# EAGLE board CT_schematic (EAGLE 7.6.0)

Size 100 x 80 mm. Coordinates in mm from the lower left corner, seen from the top.
Outline: 0,0 100,0 100,80 0,80 0,0
Copper layers (1*16): Top 0.035mm / dielectric 1.5mm / Bottom 0.035mm
Design rules "default": minimum track width 10mil, minimum drill 24mil, track to track 8mil, track to pad 8mil, pad to pad 8mil, via to via 8mil, smd to smd 8mil, copper to edge 40mil, drill to drill 8mil, minimum pad ring 10mil, minimum via ring 8mil, stop-mask expansion 4mil, vias tented up to drill 0mil, thermal gap 10mil

## Footprints (pad centres in the part's own frame; a part is rotated, then mirrored left to right if it is on the bottom)
C0603 = smd 0.8 x 0.8: 1 -0.762,0; 2 0.762,0
C0402 = smd 0.5 x 0.5: 1 -0.508,0; 2 0.508,0
C0805 = smd 1.2 x 1.3: 1 -1.016,0; 2 1.016,0
2220 = smd 1.85 x 5.5: 1 -2.55,0; 2 2.55,0
EXV-9H = smd 3.505 x 1.676: 1 -2.857,0; 2 2.857,0
L0603 = smd 0.8 x 0.8: 1 -0.762,0; 2 0.762,0
DR1040 = smd 1.6 x 3.2: 1 -4.458,0; 2 4.458,0
PJ-037B_PACKAGE = drill 3.7 square: 1 12,0 | drill 3.2 square: 2 6,0
R0603 = smd 0.8 x 0.8: 1 -0.762,0; 2 0.762,0
LQFP64 = smd 0.3 x 1.2: 1 -3.75,-5.75; 2 -3.25,-5.75; 3 -2.75,-5.75; 4 -2.25,-5.75; 5 -1.75,-5.75; 6 -1.25,-5.75; 7 -0.75,-5.75; 8 -0.25,-5.75; 9 0.25,-5.75; 10 0.75,-5.75; 11 1.25,-5.75; 12 1.75,-5.75; 13 2.25,-5.75; 14 2.75,-5.75; 15 3.25,-5.75; 16 3.75,-5.75; 33 3.75,5.75; 34 3.25,5.75; 35 2.75,5.75; 36 2.25,5.75; 37 1.75,5.75; 38 1.25,5.75; 39 0.75,5.75; 40 0.25,5.75; 41 -0.25,5.75; 42 -0.75,5.75; 43 -1.25,5.75; 44 -1.75,5.75; 45 -2.25,5.75; 46 -2.75,5.75; 47 -3.25,5.75; 48 -3.75,5.75 | smd 1.2 x 0.3: 17 5.75,-3.75; 18 5.75,-3.25; 19 5.75,-2.75; 20 5.75,-2.25; 21 5.75,-1.75; 22 5.75,-1.25; 23 5.75,-0.75; 24 5.75,-0.25; 25 5.75,0.25; 26 5.75,0.75; 27 5.75,1.25; 28 5.75,1.75; 29 5.75,2.25; 30 5.75,2.75; 31 5.75,3.25; 32 5.75,3.75; 49 -5.75,3.75; 50 -5.75,3.25; 51 -5.75,2.75; 52 -5.75,2.25; 53 -5.75,1.75; 54 -5.75,1.25; 55 -5.75,0.75; 56 -5.75,0.25; 57 -5.75,-0.25; 58 -5.75,-0.75; 59 -5.75,-1.25; 60 -5.75,-1.75; 61 -5.75,-2.25; 62 -5.75,-2.75; 63 -5.75,-3.25; 64 -5.75,-3.75
SOIC-8 = smd 1.6 x 0.6: 1 -2.7,1.905 | smd 1.55 x 0.6: 2 -2.7,0.635; 3 -2.7,-0.635; 4 -2.7,-1.905; 5 2.7,-1.905; 6 2.7,-0.635; 7 2.7,0.635; 8 2.7,1.905
SSOP-28 = smd 1.5 x 0.4: 1 -3.625,4.225; 2 -3.625,3.575; 3 -3.625,2.925; 4 -3.625,2.275; 5 -3.625,1.625; 6 -3.625,0.975; 7 -3.625,0.325; 8 -3.625,-0.325; 9 -3.625,-0.975; 10 -3.625,-1.625; 11 -3.625,-2.275; 12 -3.625,-2.925; 13 -3.625,-3.575; 14 -3.625,-4.225; 15 3.625,-4.225; 16 3.625,-3.575; 17 3.625,-2.925; 18 3.625,-2.275; 19 3.625,-1.625; 20 3.625,-0.975; 21 3.625,-0.325; 22 3.625,0.325; 23 3.625,0.975; 24 3.625,1.625; 25 3.625,2.275; 26 3.625,2.925; 27 3.625,3.575; 28 3.625,4.225
FCI_10118193-0001LF = smd 0.4 x 1.35: 1 -1.3,2.675; 2 -0.65,2.675; 3 0,2.675; 4 0.65,2.675; 5 1.3,2.675 | smd 1.6 x 1.4: 6 -3.2,2.45; 7 3.2,2.45 | smd 1.9 x 1.9: 8 -1.2,0; 9 1.2,0 | hole 0.5: -3.3,0; 3.3,0
ABS07-32.768KHZ-7-T = smd 1.1 x 2.4: 1 -2.5,0; 2 0,0
ABLS-12.000MHZ-B4-T = smd 5.6 x 2.8: 1 0,0; 2 9.5,0
ASFL1 = smd 1.7 x 1.5: 1 -1.27,-1.1; 2 1.27,-1.1; 3 1.27,1.1; 4 -1.27,1.1
QFN-16_EP = smd 0.805 x 0.3: 1 -1.452,0.75; 2 -1.452,0.25; 3 -1.452,-0.25; 4 -1.452,-0.75; 9 1.452,-0.75; 10 1.452,-0.25; 11 1.452,0.25; 12 1.452,0.75 | smd 0.3 x 0.805: 5 -0.75,-1.452; 6 -0.25,-1.452; 7 0.25,-1.452; 8 0.75,-1.452; 13 0.75,1.452; 14 0.25,1.452; 15 -0.25,1.452; 16 -0.75,1.452 | smd 1.55 x 1.55: 17 0,0
SON-6 = smd 0.55 x 0.3: 1 -0.355,0.5 | smd 0.52 x 0.3: 2 -0.37,0; 3 -0.37,-0.5; 4 0.37,-0.5; 5 0.37,0; 6 0.37,0.5
SW_4-1437565-2 = smd 1.4 x 2.1: 1 -2.23,4.55; 2 -2.23,-4.55; 3 2.23,4.55; 4 2.23,-4.55
LGM67K-G1J2-24-Z = smd 0.8 x 1.4: A -2,0; C 0,0
NC7SZ125M5X = smd 1.3 x 0.7: 1 -1.3,0.95; 2 -1.3,0; 3 -1.3,-0.95; 4 1.3,-0.95; 5 1.3,0.95
DUMMY_PACKAGE_143 = drill 0.3: 1 0,-1; 2 1.5,-1; 3 3,-1

## Placement (x,y rotation side)
C1  1e-06  [C0603]  -33.02,59.69 0 top  (outside the outline)
C2  1e-07  [C0603]  -36.83,59.69 0 top  (outside the outline)
C3  1e-07  [C0603]  -40.64,59.69 0 top  (outside the outline)
C4  1e-07  [C0603]  -44.45,59.69 0 top  (outside the outline)
C5  1e-07  [C0603]  -48.26,59.69 0 top  (outside the outline)
C6  1e-07  [C0603]  -52.07,59.69 0 top  (outside the outline)
C7  4.7e-06  [C0603]  -29.21,59.69 0 top  (outside the outline)
C8  1e-08  [C0603]  -55.88,59.69 0 top  (outside the outline)
C9  1e-08  [C0603]  -59.69,59.69 0 top  (outside the outline)
C10  1e-06  [C0603]  -63.5,59.69 0 top  (outside the outline)
C11  1e-11  [C0402]  -45.72,64.77 0 top  (outside the outline)
C12  1e-11  [C0402]  -49.53,64.77 0 top  (outside the outline)
C13  1e-08  [C0402]  -53.34,64.77 0 top  (outside the outline)
C14  1e-07  [C0402]  -57.15,64.77 0 top  (outside the outline)
C15  4.7e-06  [C0805]  -54.61,46.99 0 top  (outside the outline)
C16  1e-07  [C0402]  -60.96,64.77 0 top  (outside the outline)
C17  1e-07  [C0402]  -64.77,64.77 0 top  (outside the outline)
C18  1e-07  [C0402]  -68.58,64.77 0 top  (outside the outline)
C19  4.7e-06  [C0805]  -59.69,46.99 0 top  (outside the outline)
C20  1e-07  [C0402]  -15.24,69.85 0 top  (outside the outline)
C21  1e-07  [C0402]  -19.05,69.85 0 top  (outside the outline)
C22  1e-08  [C0402]  -22.86,69.85 0 top  (outside the outline)
C23  1e-05  [C0805]  -64.77,46.99 0 top  (outside the outline)
C24  1e-06  [C0603]  -67.31,59.69 0 top  (outside the outline)
C25  1e-07  [C0402]  -26.67,69.85 0 top  (outside the outline)
C26  6.8e-05  [2220]  -64.77,20.32 0 top  (outside the outline)
C27  1e-07  [C0402]  -30.48,69.85 0 top  (outside the outline)
C28  0.0001  [EXV-9H]  -55.88,31.75 0 top  (outside the outline)
C29  0.0001  [EXV-9H]  -17.78,40.64 0 top  (outside the outline)
C30  1e-08  [C0402]  -34.29,69.85 0 top  (outside the outline)
F1  240.0  [L0603]  -15.24,64.77 0 top  (outside the outline)
I1  3.8e-06  [DR1040]  -38.1,21.59 0 top  (outside the outline)
J1  PJ-037B  [PJ-037B_PACKAGE]  -53.34,7.62 0 top  (outside the outline)
R2  1000.0  [R0603]  -19.05,64.77 0 top  (outside the outline)
R4  4700.0  [R0603]  -22.86,64.77 0 top  (outside the outline)
R5  10000.0  [R0603]  -25.4,54.61 0 top  (outside the outline)
R6  10000.0  [R0603]  -30.48,54.61 0 top  (outside the outline)
R7  10000.0  [R0603]  -35.56,54.61 0 top  (outside the outline)
R8  10000.0  [R0603]  -40.64,54.61 0 top  (outside the outline)
R9  4700.0  [R0603]  -26.67,64.77 0 top  (outside the outline)
R10  10000.0  [R0603]  -45.72,54.61 0 top  (outside the outline)
R11  10000.0  [R0603]  -50.8,54.61 0 top  (outside the outline)
R12  4700.0  [R0603]  -30.48,64.77 0 top  (outside the outline)
R13  10000.0  [R0603]  -55.88,54.61 0 top  (outside the outline)
R14  10000.0  [R0603]  -60.96,54.61 0 top  (outside the outline)
R15  20000.0  [R0603]  -66.04,54.61 0 top  (outside the outline)
R16  91000.0  [R0603]  -15.24,59.69 0 top  (outside the outline)
R17  300000.0  [R0603]  -69.85,46.99 0 top  (outside the outline)
R18  10000.0  [R0603]  -20.32,59.69 0 top  (outside the outline)
R19  10000.0  [R0603]  -25.4,59.69 0 top  (outside the outline)
R20  9100.0  [R0603]  -34.29,64.77 0 top  (outside the outline)
R21  680000.0  [R0603]  -15.24,54.61 0 top  (outside the outline)
R22  120000.0  [R0603]  -20.32,54.61 0 top  (outside the outline)
U1  stm32f100rbt7  [LQFP64]  -64.77,7.62 0 top  (outside the outline)
U2  AT25080B-SSHL-T  [SOIC-8]  -55.88,20.32 0 top  (outside the outline)
U3  FT232RL-REEL  [SSOP-28]  -20.32,7.62 0 top  (outside the outline)
U4  10118193-0001LF  [FCI_10118193-0001LF]  -35.56,31.75 0 top  (outside the outline)
U5  FT232RL-REEL  [SSOP-28]  -33.02,7.62 0 top  (outside the outline)
U6  10118193-0001LF  [FCI_10118193-0001LF]  -45.72,31.75 0 top  (outside the outline)
U7  ABS07-32.768KHZ-7-T  [ABS07-32.768KHZ-7-T]  -27.94,48.26 0 top  (outside the outline)
U8  ABLS-12.000MHZ-B4-T  [ABLS-12.000MHZ-B4-T]  -39.37,40.64 0 top  (outside the outline)
U9  ABLS-12.000MHZ-B4-T  [ABLS-12.000MHZ-B4-T]  -59.69,40.64 0 top  (outside the outline)
U10  ASFL1-25MHZ-NCS  [ASFL1]  -26.67,31.75 0 top  (outside the outline)
U11  LTC3601EUD#PBF  [QFN-16_EP]  -39.37,64.77 0 top  (outside the outline)
U12  TPS3895ADRYR  [SON-6]  -43.18,68.58 0 top  (outside the outline)
U13  4-1437565-2  [SW_4-1437565-2]  -27.94,21.59 0 top  (outside the outline)
U14  Q65110A2395  [LGM67K-G1J2-24-Z]  -36.83,48.26 0 top  (outside the outline)
U15  nc7sz125m5x  [NC7SZ125M5X]  -48.26,46.99 0 top  (outside the outline)
U16  Dummy  [DUMMY_PACKAGE_143]  -40.64,69.85 0 top  (outside the outline)

## Library data of the parts
C1-C30 F1 I1 J1 R2 R4-R22 U1-U16 = circuit_tree

## Nets
CLK_CRYSTAL_U1_3: C11.1 U1.3 U7.1
CLK_CRYSTAL_U1_4: C12.1 U1.4 U7.2
CLK_CRYSTAL_U3_27: U3.27 U8.1
CLK_CRYSTAL_U3_28: U3.28 U8.2
CLK_CRYSTAL_U5_27: U5.27 U9.1
CLK_CRYSTAL_U5_28: U5.28 U9.2
CLK_U1_5: U1.5 U10.3
GND: C1.2 C2.2 C3.2 C4.2 C5.2 C6.2 C7.2 C8.2 C9.2 C10.2 C11.2 C12.2 C13.2 C14.2 C15.2 C16.2 C17.2 C18.2 C19.2 C20.2 C21.2 C22.2 C23.2 C24.2 C26.1 C26.2 C27.2 C28.2 C29.2 C30.2 J1.2 R2.2 R5.2 R11.2 R14.2 R15.2 R17.2 R20.2 R22.2 U1.12 U1.18 U1.31 U1.47 U1.63 U2.4 U3.7 U3.18 U3.21 U3.25 U3.26 U4.5 U4.6 U4.7 U4.8 U4.9 U5.7 U5.18 U5.21 U5.25 U5.26 U6.5 U6.6 U6.7 U6.8 U6.9 U10.2 U11.1 U11.9 U11.17 U12.2 U14.C U15.1 U15.3 U16.1
NET_U1_7: R4.1 U1.7 U15.4
NET_U1_13: C8.1 C9.1 C10.1 F1.1 U1.13
NET_U1_60: R5.1 U1.60
NET_U1_61: U14.A
NET_U1_62: U13.3 U13.4
NET_U2_3: R6.1 U2.3
NET_U2_7: R8.1 U2.7
NET_U3_14: R10.1 U3.14
NET_U3_17: C16.1 U3.17
NET_U3_19: R11.1 U3.19
NET_U4_1: R9.1 U4.1
NET_U4_2: U3.16 U4.2
NET_U4_3: U3.15 U4.3
NET_U4_19: R9.2
NET_U5_14: R13.1 U5.14
NET_U5_17: C20.1 U5.17
NET_U5_19: R14.1 U5.19
NET_U6_1: R12.1 U6.1
NET_U6_2: U5.16 U6.2
NET_U6_3: U5.15 U6.3
NET_U6_19: R12.2
NET_U11_3: C25.2 I1.1 U11.3 U11.4
NET_U11_6: C25.1 U11.6
NET_U11_7: C24.1 U11.7 U11.12
NET_U11_10: R17.1 U11.10
NET_U11_11: R15.1 R16.1 U11.11
NET_U11_14: U11.14
NET_U11_ATNET_3: I1.2 R16.2
NET_U12_1: R19.1 R20.1 U12.1
NET_U12_3: R21.2 R22.1 U12.3
NET_U12_4: R18.1 U12.4 U15.2
NET_U13_1: R2.1 U13.1 U13.2
PROC_PC13_TAMPER_RTC: U1.2 U16.2
PROC_PD1_OSC_OUT: U1.6 U16.3
PROC_SPI1_MISO: U1.22 U2.2
PROC_SPI1_MOSI: U1.23 U2.5
PROC_SPI1_NSS: R7.1 U1.20 U2.1
PROC_SPI1_SCK: U1.21 U2.6
PROC_USART1_CTS: U1.44 U3.3
PROC_USART1_RTS: U1.45 U3.11
PROC_USART1_RX: U1.43 U3.1
PROC_USART1_TX: U1.42 U3.5
PROC_USART2_CTS: U1.14 U5.3
PROC_USART2_RTS: U1.15 U5.11
PROC_USART2_RX: U1.17 U5.1
PROC_USART2_TX: U1.16 U5.5
VCC_S1_6V0: C23.1 C28.1 C29.1 J1.1 U11.15 U11.16
VCC_TIER1_3V3: C1.1 C2.1 C3.1 C4.1 C5.1 C6.1 C7.1 C13.1 C14.1 C15.1 C17.1 C18.1 C19.1 C21.1 C22.1 C26.2 C27.1 C30.1 F1.2 I1.2 R4.2 R6.2 R7.2 R8.2 R10.2 R13.2 R16.2 R18.2 R19.2 R21.1 U1.1 U1.19 U1.32 U1.48 U1.64 U2.8 U3.4 U3.20 U5.4 U5.20 U10.4 U11.8 U12.6 U15.5

## Tracks (layer width: path | path; a pad name or v marks a point on that pad's centre or on a via)
CLK_CRYSTAL_U1_3  (2 unrouted)
CLK_CRYSTAL_U1_4  (2 unrouted)
CLK_CRYSTAL_U3_27  (1 unrouted)
CLK_CRYSTAL_U3_28  (1 unrouted)
CLK_CRYSTAL_U5_27  (1 unrouted)
CLK_CRYSTAL_U5_28  (1 unrouted)
CLK_U1_5  (1 unrouted)
GND  (73 unrouted)
NET_U1_7  (2 unrouted)
NET_U1_13  (4 unrouted)
NET_U1_60  (1 unrouted)
NET_U1_62  (1 unrouted)
NET_U2_3  (1 unrouted)
NET_U2_7  (1 unrouted)
NET_U3_14  (1 unrouted)
NET_U3_17  (1 unrouted)
NET_U3_19  (1 unrouted)
NET_U4_1  (1 unrouted)
NET_U4_2  (1 unrouted)
NET_U4_3  (1 unrouted)
NET_U5_14  (1 unrouted)
NET_U5_17  (1 unrouted)
NET_U5_19  (1 unrouted)
NET_U6_1  (1 unrouted)
NET_U6_2  (1 unrouted)
NET_U6_3  (1 unrouted)
NET_U11_3  (3 unrouted)
NET_U11_6  (1 unrouted)
NET_U11_7  (2 unrouted)
NET_U11_10  (1 unrouted)
NET_U11_11  (2 unrouted)
NET_U11_ATNET_3  (1 unrouted)
NET_U12_1  (2 unrouted)
NET_U12_3  (2 unrouted)
NET_U12_4  (2 unrouted)
NET_U13_1  (2 unrouted)
PROC_PC13_TAMPER_RTC  (1 unrouted)
PROC_PD1_OSC_OUT  (1 unrouted)
PROC_SPI1_MISO  (1 unrouted)
PROC_SPI1_MOSI  (1 unrouted)
PROC_SPI1_NSS  (2 unrouted)
PROC_SPI1_SCK  (1 unrouted)
PROC_USART1_CTS  (1 unrouted)
PROC_USART1_RTS  (1 unrouted)
PROC_USART1_RX  (1 unrouted)
PROC_USART1_TX  (1 unrouted)
PROC_USART2_CTS  (1 unrouted)
PROC_USART2_RTS  (1 unrouted)
PROC_USART2_RX  (1 unrouted)
PROC_USART2_TX  (1 unrouted)
VCC_S1_6V0  (5 unrouted)
VCC_TIER1_3V3  (43 unrouted)